# EAGLE board SWD (EAGLE 6.1)
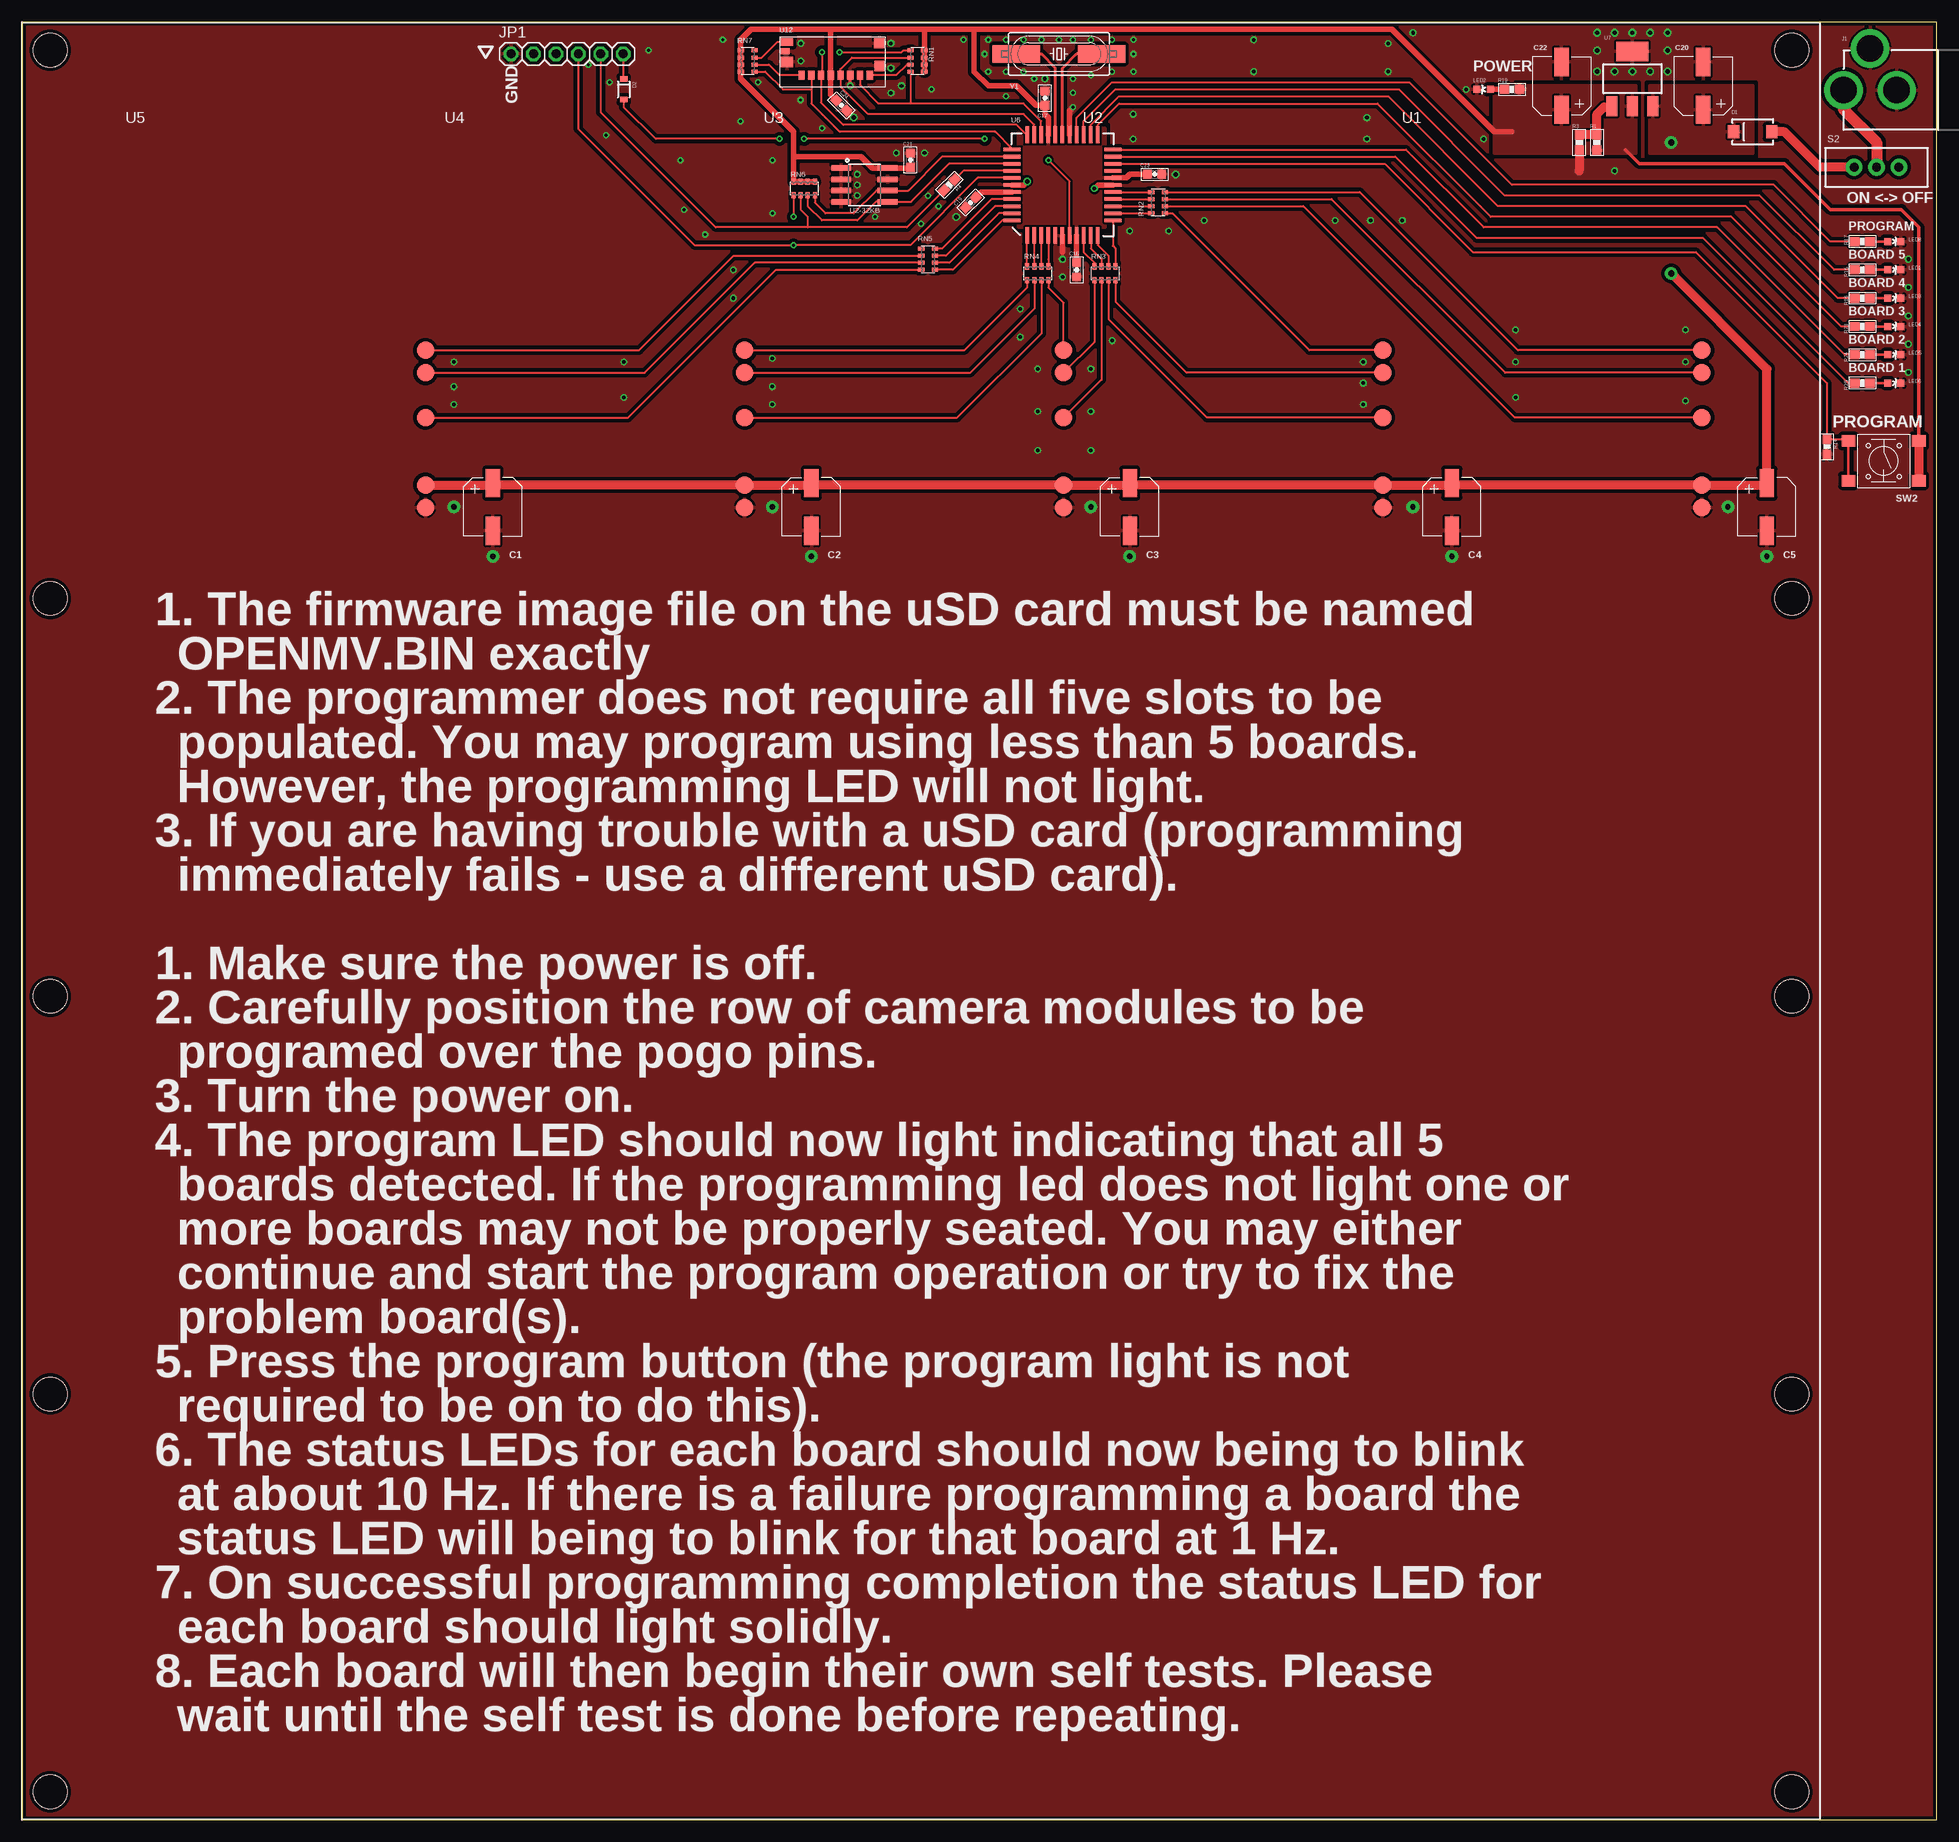
[diagram p0: board, top side]
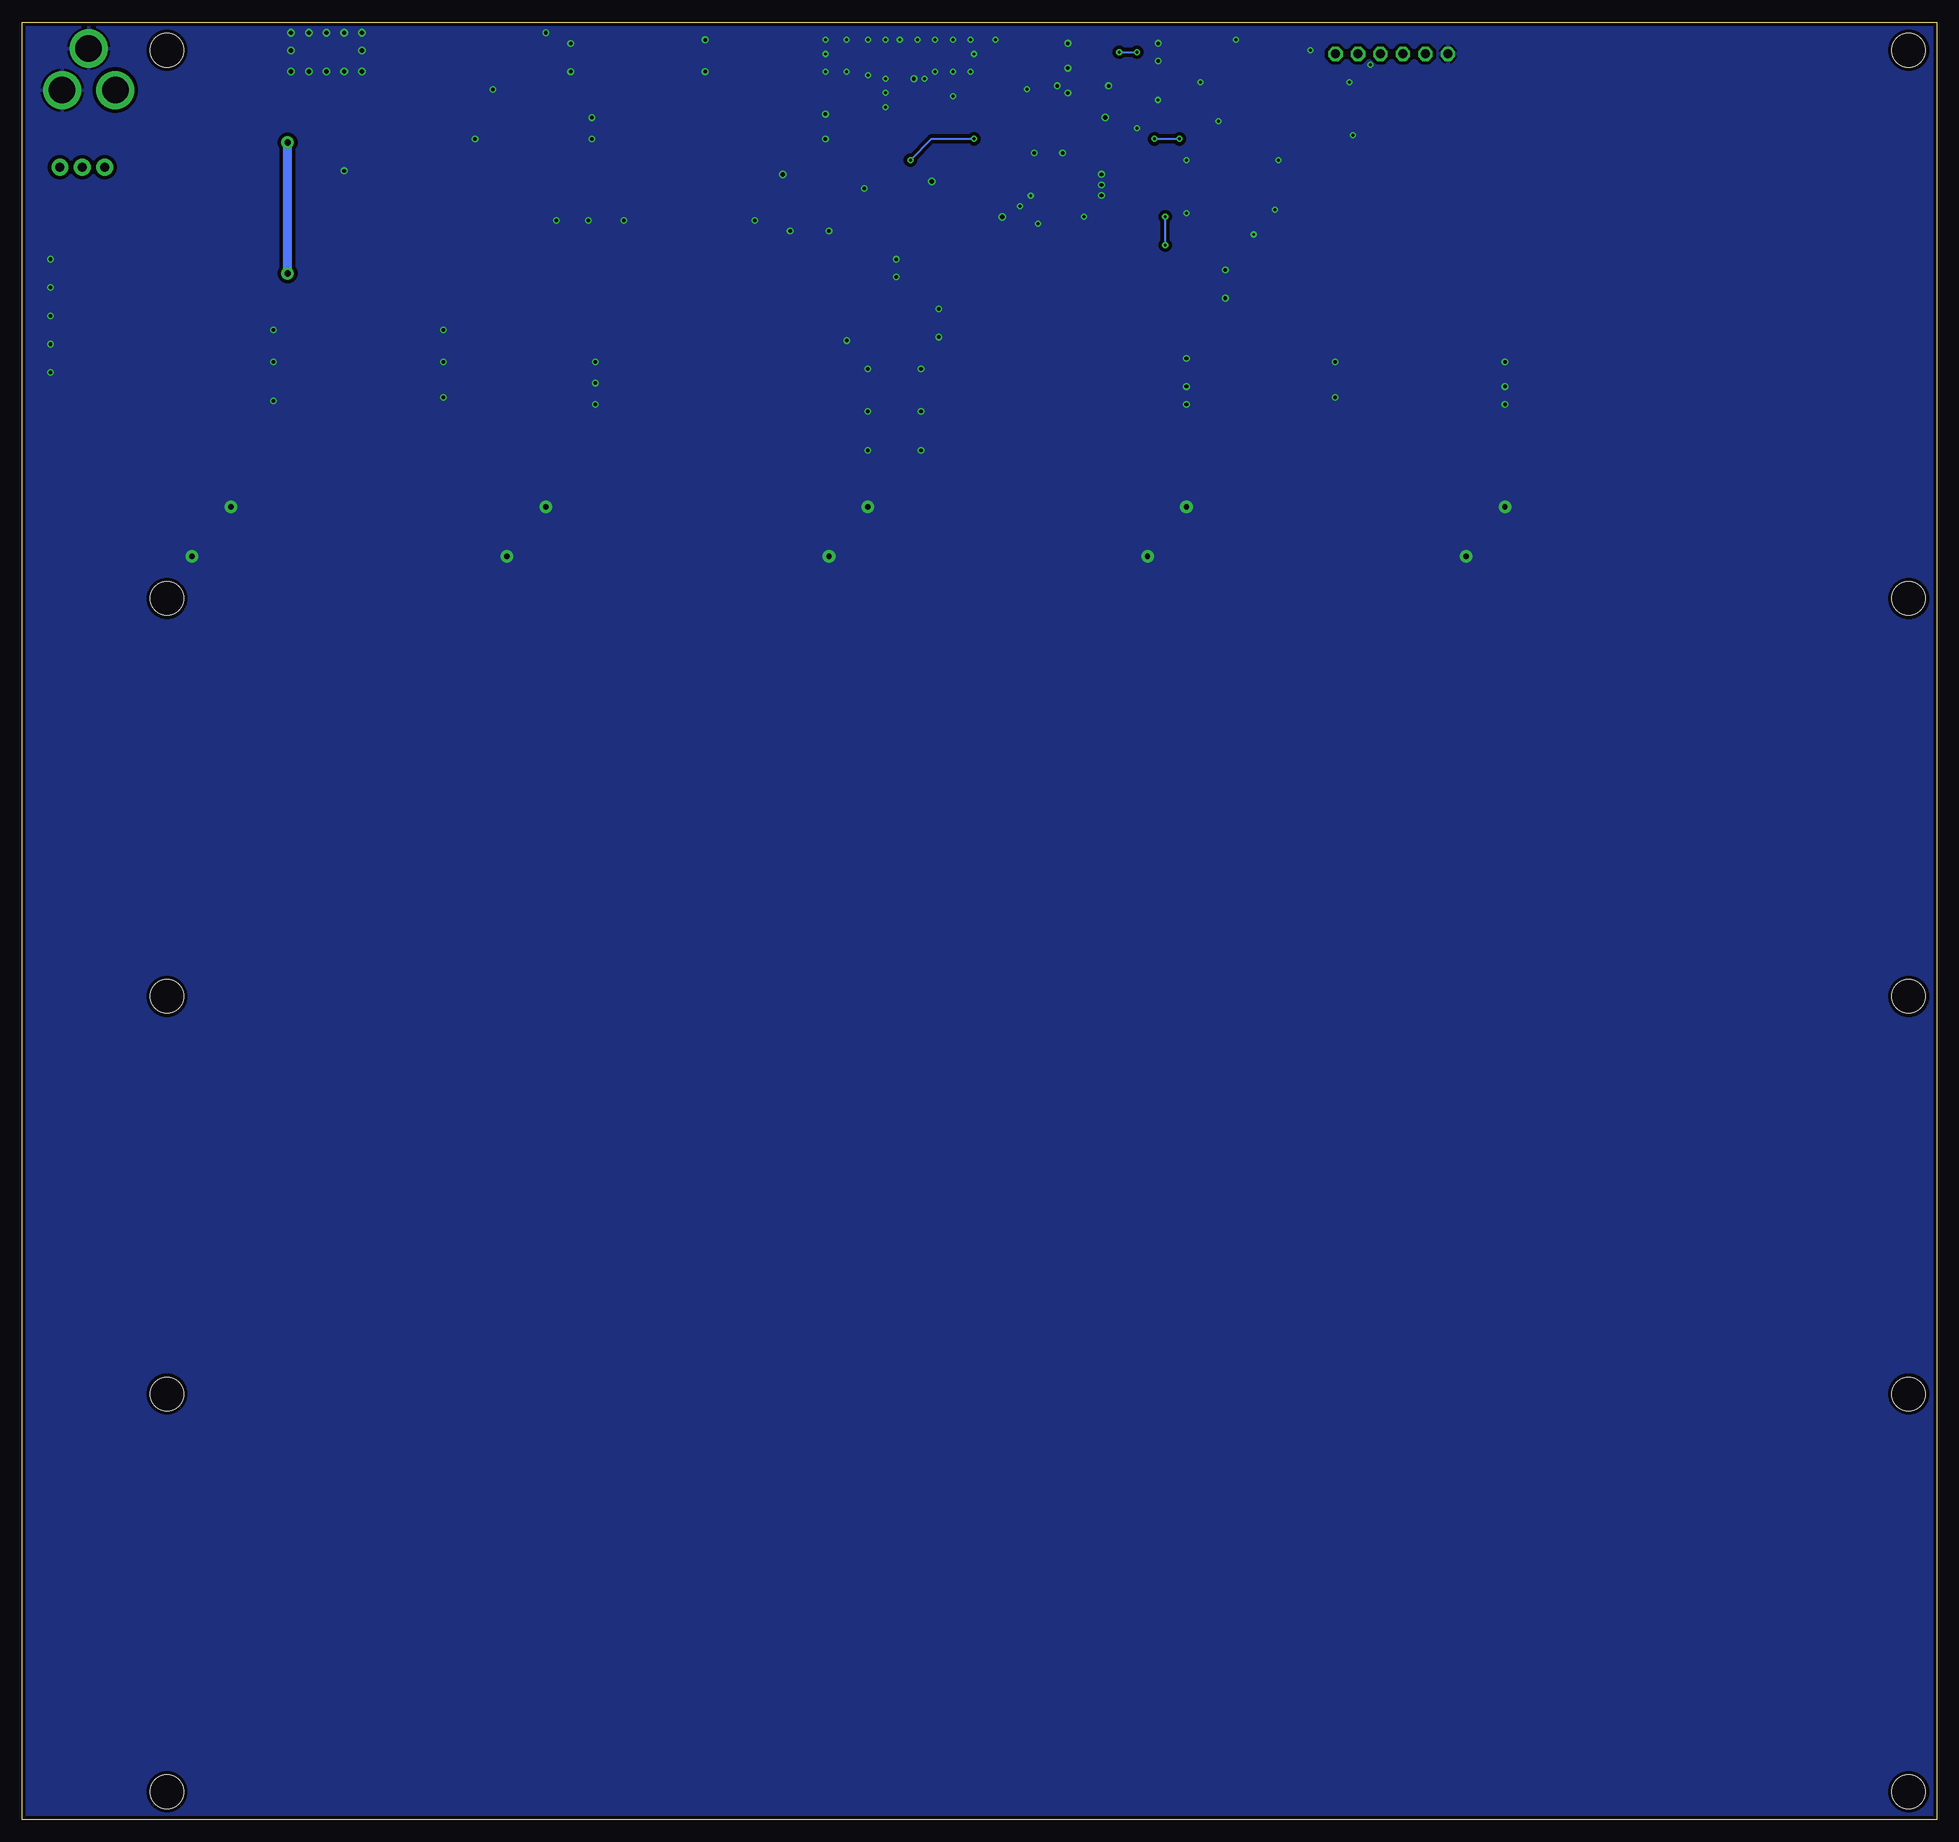
[diagram p1: board, bottom side, seen from below]

Size 216.4 x 203.2 mm. Coordinates in mm from the lower left corner, seen from the top.
Outline: 0,0 216.4,0 216.4,203.2 0,203.2 0,0
Copper layers (1*16): Top 0.0356mm / dielectric 1.5011mm / Bottom 0.0356mm
Design rules: minimum track width 6mil, minimum drill 13mil, track to track 6mil, track to pad 6mil, pad to pad 6mil, via to via 6mil, smd to smd 6mil, copper to edge 15mil, drill to drill 6mil, minimum pad ring 12mil, minimum via ring 7mil, stop-mask expansion 2mil, vias tented up to drill 13mil, thermal gap 10mil
Holes 3.81 mm at 3.17,200.03 200.03,200.03 200.03,138.05 200.03,93.09 200.03,48.13 200.03,3.17 3.17,138.05 3.17,93.09 3.17,48.13 3.17,3.17

## Footprints (pad centres in the part's own frame; a part is rotated, then mirrored left to right if it is on the bottom)
CP6.3MM = smd 1.6 x 3.2: P$1 0,-2.7; P$2 0,2.7
0603-CAP = smd 1 x 1: 1 -0.8,0; 2 0.8,0
SMA-DIODE = smd 1.27 x 1.47: A -2.15,0; C 2.15,0
SOD-323 = smd 0.63 x 0.83: 1 -1.15,0; 2 1.15,0
POWER_JACK_PTH = drill 2.997 pad 4.318: GND 0,7.7; GNDBREAK 4.7,10.7; PWR 0,13.7
1X06 = drill 1.016 octagon: 1 -6.35,0; 2 -3.81,0; 3 -1.27,0; 4 1.27,0; 5 3.81,0; 6 6.35,0
LED-0603 = smd 0.8 x 0.8: A 0,-0.75; C 0,0.75
0603-RES = smd 1.1 x 1: 1 -0.85,0; 2 0.85,0
EXBV8V = smd 0.45 x 0.7: 1 -1.2,-0.775; 2 -0.4,-0.775; 3 0.4,-0.775; 4 1.2,-0.775; 5 1.2,0.775; 6 0.4,0.775; 7 -0.4,0.775; 8 -1.2,0.775
SWITCH-SPDT = drill 1.016 pad 1.88: 1 0,2.54; 2 0,0; 3 0,-2.54
TACT6MM = smd 1.55 x 1.3: P$1 -3.975,2.25; P$2 3.975,2.25; P$3 -3.975,-2.25; P$4 3.975,-2.25
OPENMV3-JIG = smd 2 x 2: P$1 33.909,1.524; P$2 33.909,4.064; P$3 33.909,11.684; P$4 33.909,16.764; P$5 33.909,19.304
SO08 = smd 0.61 x 2.21: 1 -1.905,-2.616; 2 -0.635,-2.616; 3 0.635,-2.616; 4 1.905,-2.616; 5 1.905,2.616; 6 0.635,2.616; 7 -0.635,2.616; 8 -1.905,2.616
P8X32A-Q44 = smd 1.9 x 0.4: 1 -5.713,4.013; 2 -5.713,3.212; 3 -5.713,2.413; 4 -5.713,1.613; 5 -5.713,0.812; 6 -5.713,0.013; 7 -5.713,-0.787; 8 -5.713,-1.587; 9 -5.713,-2.388; 10 -5.713,-3.188; 11 -5.713,-3.987; 23 5.688,-3.987; 24 5.688,-3.188; 25 5.688,-2.388; 26 5.688,-1.587; 27 5.688,-0.787; 28 5.688,0.013; 29 5.688,0.812; 30 5.688,1.613; 31 5.688,2.413; 32 5.688,3.212; 33 5.688,4.013 | smd 0.4 x 1.9: 12 -4.013,-5.688; 13 -3.212,-5.688; 14 -2.413,-5.688; 15 -1.613,-5.688; 16 -0.812,-5.688; 17 -0.013,-5.688; 18 0.787,-5.688; 19 1.587,-5.688; 20 2.388,-5.688; 21 3.188,-5.688; 22 3.987,-5.688; 34 3.987,5.713; 35 3.188,5.713; 36 2.388,5.713; 37 1.587,5.713; 38 0.787,5.713; 39 -0.013,5.713; 40 -0.812,5.713; 41 -1.613,5.713; 42 -2.413,5.713; 43 -3.212,5.713; 44 -4.013,5.713
SOT223 = smd 1.219 x 2.235: 1 -2.311,-3.099; 2 0,-3.099; 3 2.311,-3.099 | smd 3.6 x 2.2: 4 0,3.099
USD-47571 = smd 1.15 x 1.15: G$1 -4.9,0.55 | smd 1.2 x 1.1: G$2 -4.9,-2 | smd 1.4 x 1.2: G$3 5.55,0.1 | smd 1 x 0.7: G$4 5.75,-1.1 | smd 1.4 x 0.85: G$5 5.55,-2.15 | smd 0.7 x 1: P$1 3.9,1.6; P$2 2.8,1.6; P$3 1.7,1.6; P$4 0.6,1.6; P$5 -0.5,1.6; P$6 -1.6,1.6; P$7 -2.7,1.6; P$8 -3.8,1.6
HC49UP = smd 5.334 x 1.93: 1 -4.826,0; 2 4.826,0

## Placement (x,y rotation side)
C1  47uF  [CP6.3MM]  53.2,148.4 180 top
C2  47uF  [CP6.3MM]  89.2,148.4 180 top
C3  47uF  [CP6.3MM]  125.2,148.4 180 top
C4  47uF  [CP6.3MM]  161.6,148.4 180 top
C5  47uF  [CP6.3MM]  197.2,148.4 180 top
C16  0.1uF  [0603-CAP]  119.2,175.2 270 top
C17  0.1uF  [0603-CAP]  115.6,194.6 90 top
C19  1uF  [0603-CAP]  107.2,182.8 225 top
C20  47uF  [CP6.3MM]  190,196 0 top
C21  1uF  [0603-CAP]  100.4,187.6 90 top
C22  47uF  [CP6.3MM]  174,196 0 top
C23  0.1uF  [0603-CAP]  128,186 0 top
C24  0.1uF  [0603-CAP]  92.6,193.8 315 top
D1  [SMA-DIODE]  195.6,190.8 180 top
D2  [SOD-323]  68,195.6 270 top
FRAME1  FRAME-LEDGER  [CREATIVE_COMMONS]  0,0 0 top
J1  POWER_JACKPTH  [POWER_JACK_PTH]  219.57,195.51 90 top
JP1  [1X06]  61.6,199.6 0 top
LED1  GREEN  [LED-0603]  211.6,175.2 270 top
LED2  RED  [LED-0603]  165.2,195.6 90 top
LED3  GREEN  [LED-0603]  211.6,172 270 top
LED4  GREEN  [LED-0603]  211.6,168.8 270 top
LED5  GREEN  [LED-0603]  211.6,165.6 270 top
LED6  GREEN  [LED-0603]  211.6,162.4 270 top
LED8  RED  [LED-0603]  211.6,178.4 270 top
R1  240  [0603-RES]  178,189.6 90 top
R3  390  [0603-RES]  176,189.6 270 top
R4  100R  [0603-RES]  104.8,184.8 225 top
R14  10K  [0603-RES]  204,155.2 270 top
R15  220  [0603-RES]  208,175.2 0 top
R16  220  [0603-RES]  208,172 0 top
R17  220  [0603-RES]  208,178.4 0 top
R19  220  [0603-RES]  168.4,195.6 180 top
R23  220  [0603-RES]  208,168.8 0 top
R24  220  [0603-RES]  208,165.6 0 top
R25  220  [0603-RES]  208,162.4 0 top
RN1  10K  [EXBV8V]  101.2,198.8 270 top
RN2  100R  [EXBV8V]  128.4,182.8 90 top
RN3  100R  [EXBV8V]  122.4,174.8 0 top
RN4  100R  [EXBV8V]  114.8,174.8 0 top
RN5  100R  [EXBV8V]  102.4,176.4 270 top
RN6  10K  [EXBV8V]  88.4,184.4 0 top
RN7  10K  [EXBV8V]  82,198.8 90 top
S2  [SWITCH-SPDT]  209.6,186.8 270 top
SW2  [TACT6MM]  210.4,153.6 180 top
U1  OPENMV3-JIG  [OPENMV3-JIG]  155.96,146.81 0 top
U2  OPENMV3-JIG  [OPENMV3-JIG]  119.89,146.81 0 top
U2-32KB  EEPROM-I2CSMD  [SO08]  95.2,184.8 270 top
U3  OPENMV3-JIG  [OPENMV3-JIG]  83.82,146.81 0 top
U4  OPENMV3-JIG  [OPENMV3-JIG]  47.75,146.81 0 top
U5  OPENMV3-JIG  [OPENMV3-JIG]  11.68,146.81 0 top
U6  [P8X32A-Q44]  117.6,184.8 90 top
U7  [SOT223]  182,196.8 0 top
U12  USD-47571  [USD-47571]  92,198.8 180 top
Y1  5MHz-18pF-30ppm  [HC49UP]  117.2,199.6 180 top

## Library data of the parts
C1-C5 C20 C22 = MF_Passives; MFG#: N/A; TOLERANCE: N/A; VOTLAGE: N/A
C16 C17 C19 C21 C23 C24 D1 D2 J1 LED1-LED6 LED8 R1 R3 R4 R14-R17 R19 R23-R25 S2 U7 = sfe
FRAME1 = SparkFun-Aesthetics
JP1 = pinhead
RN1-RN7 = resistor-dil; OC_FARNELL: unknown; OC_NEWARK: unknown
SW2 = MF_Switches; MFG#: N/A
U1-U5 = openmv
U2-32KB U6 = SparkFun-DigitalIC
U12 = mux
Y1 = SparkFun-FreqCtrl

## Nets
3.3V: C16.1 C17.1 C19.1 C21.1 C22.P$1 C23.1 C24.1 R1.1 R19.1 RN1.5 RN1.6 RN1.7 RN1.8 RN6.5 RN6.6 RN6.7 RN6.8 RN7.5 RN7.6 RN7.7 RN7.8 SW2.P$1 SW2.P$3 U2-32KB.8 U6.8 U6.18 U6.30 U6.40 U7.2 U12.P$4
GND: C1.P$2 C2.P$2 C3.P$2 C4.P$2 C5.P$2 C16.2 C17.2 C19.2 C20.P$2 C21.2 C22.P$2 C23.2 C24.2 J1.GND J1.GNDBREAK JP1.1 LED1.C LED2.C LED3.C LED4.C LED5.C LED6.C LED8.C R3.2 R14.2 U1.P$1 U2-32KB.1 U2-32KB.2 U2-32KB.3 U2-32KB.4 U2-32KB.7 U2.P$1 U3.P$1 U4.P$1 U5.P$1 U6.5 U6.6 U6.17 U6.27 U6.39 U7.4 U12.G$1 U12.G$2 U12.G$3 U12.G$4 U12.P$6
I2C_SCL: RN6.4 U2-32KB.6 U6.35
I2C_SDA: RN6.3 U2-32KB.5 U6.36
N$1: R4.1 U6.37
N$2: D1.A S2.3
N$3: U6.28 Y1.1
N$4: U6.29 Y1.2
N$6: LED2.A R19.2
N$7: D2.2 U6.7
N$9: J1.PWR S2.2
N$12: RN1.3 U12.P$8
N$13: RN7.2 U12.P$1
N$14: LED6.A R25.2
N$15: LED5.A R24.2
N$16: LED4.A R23.2
N$18: LED3.A R16.2
N$19: LED1.A R15.2
N$20: LED8.A R17.2
N$21: RN5.1
N$22: RN2.8 U6.13
N$23: RN2.7 U6.14
N$24: RN2.6 U6.15
N$25: RN2.5 U6.16
N$26: RN3.5 U6.12
N$27: RN3.6 U6.11
N$28: RN3.7 U6.10
N$29: RN3.8 U6.9
N$31: R1.2 R3.1 U7.1
N$41: RN5.6 U6.43
N$42: RN5.7 U6.42
N$43: RN5.8 U6.41
N$46: RN5.5 U6.44
N$47: RN4.8 U6.1
N$48: RN4.7 U6.2
N$49: RN4.6 U6.3
N$50: RN4.5 U6.4
PROGRAM_LED: R17.1 U6.26
PROGRAM_PB: R14.1 SW2.P$2 SW2.P$4 U6.20
PROP_RESET: D2.1 JP1.6
SD_CD: RN7.3 U12.G$5
SD_CLK: RN1.2 U6.32 U12.P$5
SD_CS: RN7.1 U6.34 U12.P$2
SD_DI: RN1.1 U6.33 U12.P$3
SD_DO: RN1.4 U6.31 U12.P$7
SERIAL_RX: JP1.4 RN6.1 U6.38
SERIAL_TX: JP1.5 R4.2 RN6.2
SWD_CLK_1: RN2.4 U1.P$5
SWD_CLK_2: RN2.1 U2.P$5
SWD_CLK_3: RN4.4 U3.P$5
SWD_CLK_4: RN4.1 U4.P$5
SWD_CLK_5: RN5.2 U5.P$5
SWD_DAT_1: RN2.3 U1.P$4
SWD_DAT_2: RN3.4 U2.P$4
SWD_DAT_3: RN3.1 U3.P$4
SWD_DAT_4: RN4.2 U4.P$4
SWD_DAT_5: RN5.3 U5.P$4
SWD_LED_1: R25.1 U6.21
SWD_LED_2: R24.1 U6.22
SWD_LED_3: R23.1 U6.23
SWD_LED_4: R16.1 U6.24
SWD_LED_5: R15.1 U6.25
SWD_RST_1: RN2.2 U1.P$3
SWD_RST_2: RN3.3 U2.P$3
SWD_RST_3: RN3.2 U3.P$3
SWD_RST_4: RN4.3 U4.P$3
SWD_RST_5: RN5.4 U5.P$3
VIN: C1.P$1 C2.P$1 C3.P$1 C4.P$1 C5.P$1 C20.P$1 D1.C U1.P$2 U2.P$2 U3.P$2 U4.P$2 U5.P$2 U7.3

## Tracks (layer width: path | path; a pad name or v marks a point on that pad's centre or on a via)
3.3V
  Top 0.406: 214.38,155.2 214.4,155.22 214.4,180 212.4,182 204.4,182 199.2,187.2 182.8,187.2 181.2,188.8
  Top 0.61: C16.1 119.2,179.07 U6.8 | C23.1 125.2,186 124.8,185.6 U6.18 | U6.40 108.39,183.99 C19.1 | C21.1 100.31,186.71 U2-32KB.8 96.09,186.71 94.8,188 87.2,188 | RN7.7 RN7.6 RN7.5 | 107.6,202.4 154.8,202.4 166.4,190.8 168.4,190.8 | 107.6,202.4 102,202.4 | 102,202.4 91.6,202.4 | 91.6,202.4 91.4,202.2 U12.P$4 91.4,195 C24.1 | RN1.5 RN1.6 RN1.7 RN1.8 101.97,202.38 102,202.4 | RN6.5 RN6.6 RN6.7 RN6.8 87.2,188 | 107.6,202.4 107.6,197.6 109.2,196 112.4,196 114.6,193.8 C17.1 115.6,192.8 | U6.30 115.99,192.41 115.6,192.8 | 115.6,192.8 | RN7.7 81.22,201.22 82.4,202.4 91.6,202.4 | RN7.7 RN7.8 81.22,196.78 87.2,190.8 87.2,188
  Top 1.016: SW2.P$3 214.38,155.2 SW2.P$1
  pour Top (isolate 0.254): 112.6,191.2 112.6,180 122.4,180 122.4,191.2
  pour Top (isolate 0.254): 166.4,196 182.4,196 182.4,188.4 166.4,188.4
GND  (via drill 0.33, 0.4 pad 0.25, 0.41, 0.5, 0.6 pad 1.42)
  Top 0.406: U12.P$6 v93.6,196
  Top 0.61: C24.2 v94,192.4 | U6.17 121.61,184.79 v121.2,184.4 | U6.39 113.21,184.79 v113.6,185.2 | U6.27 118.39,193.19 v118.8,193.6 | U6.6 117.59,177.21
  Top 1.016: R3.2 176,186.4
  other vias: 115.6,196.8 98.2,198 105.6,181.2 130.4,186 213.2,173.2 213.2,176.4 213.2,170 213.2,166.8 213.2,163.6 94.4,186 94.4,184.8 98.2,200.8 88,200.8 88,198.8 94.4,183.6 118.8,195.2 118.8,196.8 120.8,197.2 123.2,197.6 125.6,197.6 125.6,199.6 125.6,201.2 123.2,201.2 120.8,201.2 118.8,201.2 117.2,201.2 115.2,201.2 113.2,201.2 111.2,201.2 109.2,201.2 108.8,199.6 109.2,197.6 111.2,197.6 113.2,197.6 114.4,196.8 106.4,201.2 102.8,195.6 111.2,194.8 66.4,196.4 88,194.4 90.4,191.2 102,188.4 98.8,188.4 48.8,160 48.8,164.8 68,164.8 68,160.8 80.4,175.2 80.4,172 84.8,162 84.8,160 112.8,167.6 112.8,170.8 151.6,162.4 151.6,160 151.6,164.8 133.6,180.8 129.6,179.6 125.2,179.6 157.2,148.4 192.8,148.4 120.8,148.4 84.8,148.4 48.8,148.4 53.2,142.8 89.2,142.8 125.2,142.8 161.6,142.8 197.2,142.8 48.8,162 84.8,165.2 120.8,154.8 120.8,159.2 120.8,164 114.8,164 123.2,167.2 148.4,180.8 152.4,180.8 156,180.8 168.8,160.8 168.8,164.8 168.8,168.4 188,164.8 188,160.4 188,168.4 178,202 178,200 178,197.6 180,197.6 182,197.6 184,197.6 186,197.6 186,200 186,202 184,202 182,202 180,202 165.2,190 154.4,200.8 180,186.4 125.6,192.8 125.6,190 152,192.4 152,190 154.4,197.6 157.2,202 139.2,201.2 139.2,197.6 163.2,195.6 117.6,176.4 117.6,174.4 64,198.4 66,190.4 74.8,182 83.2,196.4 70.8,200 74.4,187.6 114.8,159.2 114.8,154.8 98.2,195.2 99.4,196 79.2,201.2 81.2,192 84.8,181.6 84.8,187.6 96.4,181.2 102.4,183.6 103.6,182.4 101.6,180.4 77.2,179.2
  pour Bottom (isolate 0.406): 0,0 216.4,0 216.4,203.2 0,203.2
  pour Top (isolate 0.406, rank 2): 0,0 216.4,0 216.4,203.2 0,203.2
I2C_SCL
  Top 0.254: U6.35 103.99,187.99 100.17,184.16 U2-32KB.6 96.56,184.16 94,181.6 90.8,181.6 89.6,182.8 RN6.4
I2C_SDA
  Top 0.254: U6.36 104.79,187.19 100.5,182.9 U2-32KB.5 96.5,182.9 94.4,180.8 90.4,180.8 88.8,182.4 RN6.3
N$1
  Top 0.254: U6.37 106.39,186.39 R4.1
N$2
  Top 1.016: S2.3 203.2,186.8 199.2,190.8 D1.A
N$3
  Top 0.33: U6.28 117.59,197.99 119.2,199.6 Y1.1
N$4
  Top 0.33: U6.29 116.79,198.01 115.2,199.6 Y1.2
N$6
  Top 0.61: R19.2 LED2.A
N$7  (via drill 0.33)
  Top 0.254: U6.7 118.39,185.21 v116,187.6 | v108.8,190 v88.4,190 | v85.6,190 71.6,190 68,193.6 D2.2
  Bottom 0.254: v116,187.6 113.6,190 v108.8,190 | v88.4,190 v85.6,190
N$9
  Top 1.27: J1.PWR 205.88,193.32 209.6,189.6 S2.2
N$12
  Top 0.254: RN1.3 100,198.4 98.8,197.2 U12.P$8
  Top 0.305: U12.P$8
N$13
  Top 0.254: RN7.2 84.4,198.4 85.6,197.2 | U12.P$1 85.6,197.2 | 85.6,197.2
N$14
  Top 0.305: R25.2 LED6.A
N$15
  Top 0.305: R24.2 LED5.A
N$16
  Top 0.305: R23.2 LED4.A
N$18
  Top 0.305: R16.2 LED3.A
N$19
  Top 0.305: R15.2 LED1.A
N$20
  Top 0.305: R17.2 LED8.A
N$22
  Top 0.254: U6.13 127.61,181.59 RN2.8
N$23
  Top 0.254: U6.14 127.61,182.39 RN2.7
N$24
  Top 0.254: U6.15 127.61,183.19 RN2.6
N$25
  Top 0.254: U6.16 127.61,183.99 RN2.5
N$26
  Top 0.254: U6.12 123.29,177.91 123.6,177.6 RN3.5
N$27
  Top 0.254: U6.11 121.59,178.01 122.8,176.8 RN3.6
N$28
  Top 0.254: U6.10 120.79,177.61 122,176.4 RN3.7
N$29
  Top 0.254: U6.9 119.99,177.21 121.2,176 RN3.8
N$31
  Top 1.016: R3.1 R1.2 178,192.8 178.8,193.6 179.2,193.6 U7.1
N$41
  Top 0.254: U6.43 110.39,181.59 104.8,176 RN5.6
N$42
  Top 0.254: U6.42 109.99,182.39 104.4,176.8 RN5.7
N$43
  Top 0.254: U6.41 109.59,183.19 104,177.6 RN5.8
N$46
  Top 0.254: U6.44 110.79,180.79 105.2,175.2 RN5.5
N$47
  Top 0.254: RN4.8 113.6,179.07 U6.1
N$48
  Top 0.254: RN4.7 114.4,179.07 U6.2
N$49
  Top 0.254: RN4.6 115.2,179.07 U6.3
N$50
  Top 0.254: U6.4 115.99,176.39 RN4.5
PROGRAM_LED
  Top 0.254: U6.26 119.19,192.39 123.2,196.4 156.8,196.4 168.4,184.8 198,184.8 204.4,178.4 R17.1
PROGRAM_PB
  Top 0.254: U6.20 154.01,187.19 164,177.2 189.2,177.2 204,162.4 R14.1 206.22,156.05 SW2.P$4
  Top 0.305: SW2.P$4 SW2.P$2
PROP_RESET
  Top 0.254: D2.1 68,199.55 JP1.6
SD_CD
  Top 0.254: RN7.3 83.6,199.2 85.35,200.95 U12.G$5
SD_CLK
  Top 0.254: U6.32 114.39,191.61 113.2,192.8 95.6,192.8 92.5,195.9 U12.P$5 92.5,197.9 93.8,199.2 RN1.2
SD_CS
  Top 0.254: U6.34 111.89,188.91 110,190.8 92.4,190.8 89.2,194 89.2,195.6 | U12.P$2 89.2,195.6 | RN7.1 84,197.6 86,195.6 89.2,195.6
SD_DI  (via drill 0.33)
  Top 0.254: U6.33 113.51,190.49 112.4,191.6 92.8,191.6 90.3,194.1 U12.P$3 90.4,197.3 v90.4,199.8 | v92.4,199.8 99.4,199.8 99.6,200 RN1.1
  Bottom 0.254: v92.4,199.8 v90.4,199.8
SD_DO
  Top 0.254: U6.31 115.19,192.01 113.2,194 100.4,194 | 100.4,194 96.8,194 94.7,196.1 U12.P$7 | RN1.4 100.42,194.03 100.4,194
SERIAL_RX  (via drill 0.33)
  Top 0.254: U6.38 107.99,185.59 100.4,178 v87.2,178 76,178 62.87,191.13 JP1.4 | RN6.1 v87.2,181.2
  Bottom 0.254: v87.2,181.2 v87.2,178
SERIAL_TX
  Top 0.254: 88.8,180 100,180 R4.2 | RN6.2 88,182 88.8,181.2 88.8,180 | 88.8,180 78.4,180 65.41,192.99 JP1.5
SWD_CLK_1
  Top 0.254: RN2.4 151.2,184 169.08,166.12 U1.P$5
SWD_CLK_2
  Top 0.254: U2.P$5 145.48,166.12 130,181.6 RN2.1
SWD_CLK_3
  Top 0.254: RN4.4 116,173.2 117.73,171.47 U3.P$5
SWD_CLK_4
  Top 0.254: U4.P$5 106.52,166.12 113.6,173.2 RN4.1
SWD_CLK_5
  Top 0.254: U5.P$5 69.72,166.12 80.4,176.8 RN5.2
SWD_DAT_1
  Top 0.254: RN2.3 148,183.2 167.62,163.58 U1.P$4
SWD_DAT_2
  Top 0.254: U2.P$4 131.62,163.58 123.6,171.6 RN3.4
SWD_DAT_3
  Top 0.254: RN3.1 121.2,167.05 U3.P$4
SWD_DAT_4
  Top 0.254: U4.P$4 107.18,163.58 114.4,170.8 RN4.2
SWD_DAT_5
  Top 0.254: U5.P$4 70.38,163.58 82.8,176 RN5.3
SWD_LED_1
  Top 0.254: R25.1 206.4,162.4 190,178.8 164.4,178.8 155.21,187.99 U6.21
SWD_LED_2
  Top 0.254: R24.1 206,165.6 191.6,180 165.2,180 156.41,188.79 U6.22
SWD_LED_3
  Top 0.254: U6.23 121.59,191.59 124,194 153.2,194 166,181.2 193.2,181.2 205.6,168.8 R23.1
SWD_LED_4
  Top 0.254: U6.24 120.79,191.59 124,194.8 154.4,194.8 166.8,182.4 194.8,182.4 205.2,172 R16.1
SWD_LED_5
  Top 0.254: U6.25 119.99,191.99 123.6,195.6 155.6,195.6 167.6,183.6 196.4,183.6 204.8,175.2 R15.1
SWD_RST_1
  Top 0.254: RN2.2 144.8,182.4 168.7,158.5 U1.P$3
SWD_RST_2
  Top 0.254: U2.P$3 133.9,158.5 122.8,169.6 RN3.3
SWD_RST_3
  Top 0.254: U3.P$3 122,162.77 RN3.2
SWD_RST_4
  Top 0.254: U4.P$3 105.7,158.5 115.2,168 RN4.3
SWD_RST_5
  Top 0.254: U5.P$3 68.5,158.5 85.2,175.2 RN5.4
VIN  (via drill 0.7 pad 1.42)
  Top 1.016: v186.4,174.8 197.2,164 C5.P$1 196.98,150.88 U1.P$2 161.82,150.88 C4.P$1 161.38,150.88 U2.P$2 125.42,150.88 C3.P$1 124.98,150.88 U3.P$2 89.42,150.88 C2.P$1 88.98,150.88 U4.P$2 53.42,150.88 C1.P$1 52.98,150.88 U5.P$2
  Bottom 1.016: v186.4,174.8 v186.4,189.6
  pour Top (isolate 0.254): 184,196 195.6,196 195.6,188.4 184,188.4

## Text on the board
tPlace: POWER | GND | ON <-> OFF | PROGRAM | BOARD 5 | BOARD 4 | BOARD 3 | BOARD 2 | BOARD 1 | PROGRAM | 1. The firmware image file on the uSD card must be named | OPENMV.BIN exactly | 2. The programmer does not require all five slots to be | populated. You may program using less than 5 boards. | However, the programming LED will not light. | 3. If you are having trouble with a uSD card (programming | immediately fails - use a different uSD card). | 1. Make sure the power is off. | 2. Carefully position the row of camera modules to be | programed over the pogo pins. | 3. Turn the power on. | 4. The program LED should now light indicating that all 5 | boards detected. If the programming led does not light one or | more boards may not be properly seated. You may either | continue and start the program operation or try to fix the | problem board(s). | 5. Press the program button (the program light is not | required to be on to do this). | 6. The status LEDs for each board should now being to blink | at about 10 Hz. If there is a failure programming a board the | status LED will being to blink for that board at 1 Hz. | 7. On successful programming completion the status LED for | each board should light solidly. | 8. Each board will then begin their own self tests. Please | wait until the self test is done before repeating.